# EAGLE board heater stage belt (EAGLE 7.7.0)
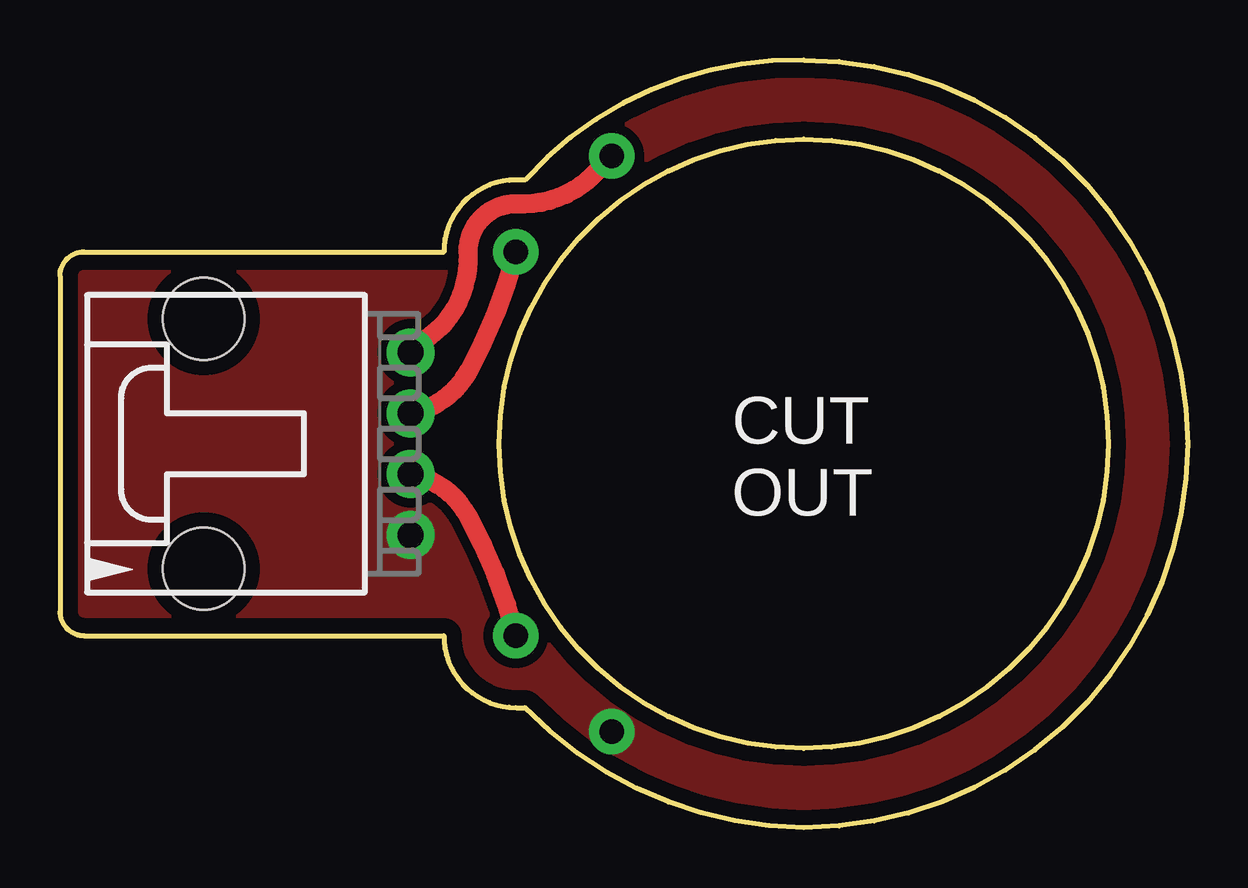
[diagram p0: board, top side]

Size 47 x 32 mm. Coordinates in mm from the lower left corner, seen from the top.
Outline: 31,32 arc-90 47,16 arc-90 31,0 arc-45 19.38,5 19,5 arc-90 16,8 1,8 arc-90 0,9 0,23 arc-90 1,24 16,24 arc-90 19,27 19.38,27 arc-49 31,32
Outline: 31,28.7 arc-90 43.7,16 arc-90 31,3.3 arc-90 18.3,16 arc-90 31,28.7
Copper layers (1*16): Top 0.035mm / dielectric 1.5mm / Bottom 0.035mm
Design rules "default *": minimum track width 10mil, minimum drill 24mil, track to track 15mil, track to pad 15mil, pad to pad 15mil, via to via 15mil, smd to smd 15mil, copper to edge 25mil, drill to drill 8mil, minimum pad ring 10mil, minimum via ring 8mil, stop-mask expansion 4mil, vias tented up to drill 0mil, thermal gap 10mil

## Footprints (pad centres in the part's own frame; a part is rotated, then mirrored left to right if it is on the bottom)
70553-04 = drill 1.092 pad 2: 1 -3.81,-7.62; 2 -1.27,-7.62; 3 1.27,-7.62; 4 3.81,-7.62 | hole 3.404: 5.207,1.016; -5.207,1.016
EFDSAWEFWD = drill 1.016 pad 1.905: 4 0,0

## Placement (x,y rotation side)
E$1  [70553-04]  7,16 90 top
E$3  [EFDSAWEFWD]  23,28 0 top
E$4  [EFDSAWEFWD]  19,24 0 top
E$6  [EFDSAWEFWD]  19,8 0 top
GND  [EFDSAWEFWD]  23,4 0 top

## Library data of the parts
E$1 = ejl-con-molex
E$3 E$4 E$6 GND = ejl-pinhead

## Nets
GND: E$1.1 GND.4
S$2: E$3.4
S$3: E$6.4

## Tracks (layer width: path | path; a pad name or v marks a point on that pad's centre or on a via)
GND
  pour Top (no thermals): -2,36 -7,-2 44,-2 62,33
S$2
  Top 0.8: E$3.4 22,27 arc-45 19,26 arc90 17,24 arc-45 16,21 14.62,19.81
S$3
  Top 0.8: E$6.4 arc15 17,13 arc50 14.62,14.73
S$4
  Top 0.8: 14.62,17.27 arc50 17,19 arc15 19,24

## Text on the board
tPlace: CUT / OUT